# Altium PCB PCB2.PcbDoc (part 3 of 3)
Units mil, origin at the board's own origin, x right, y up, seen from the top; angles counter-clockwise.
Board outline 3877.63 x 3875.01 mil, 2 copper layers (Top Layer, Bottom Layer); 98 components, 72 nets, 361 pads, 109 vias.
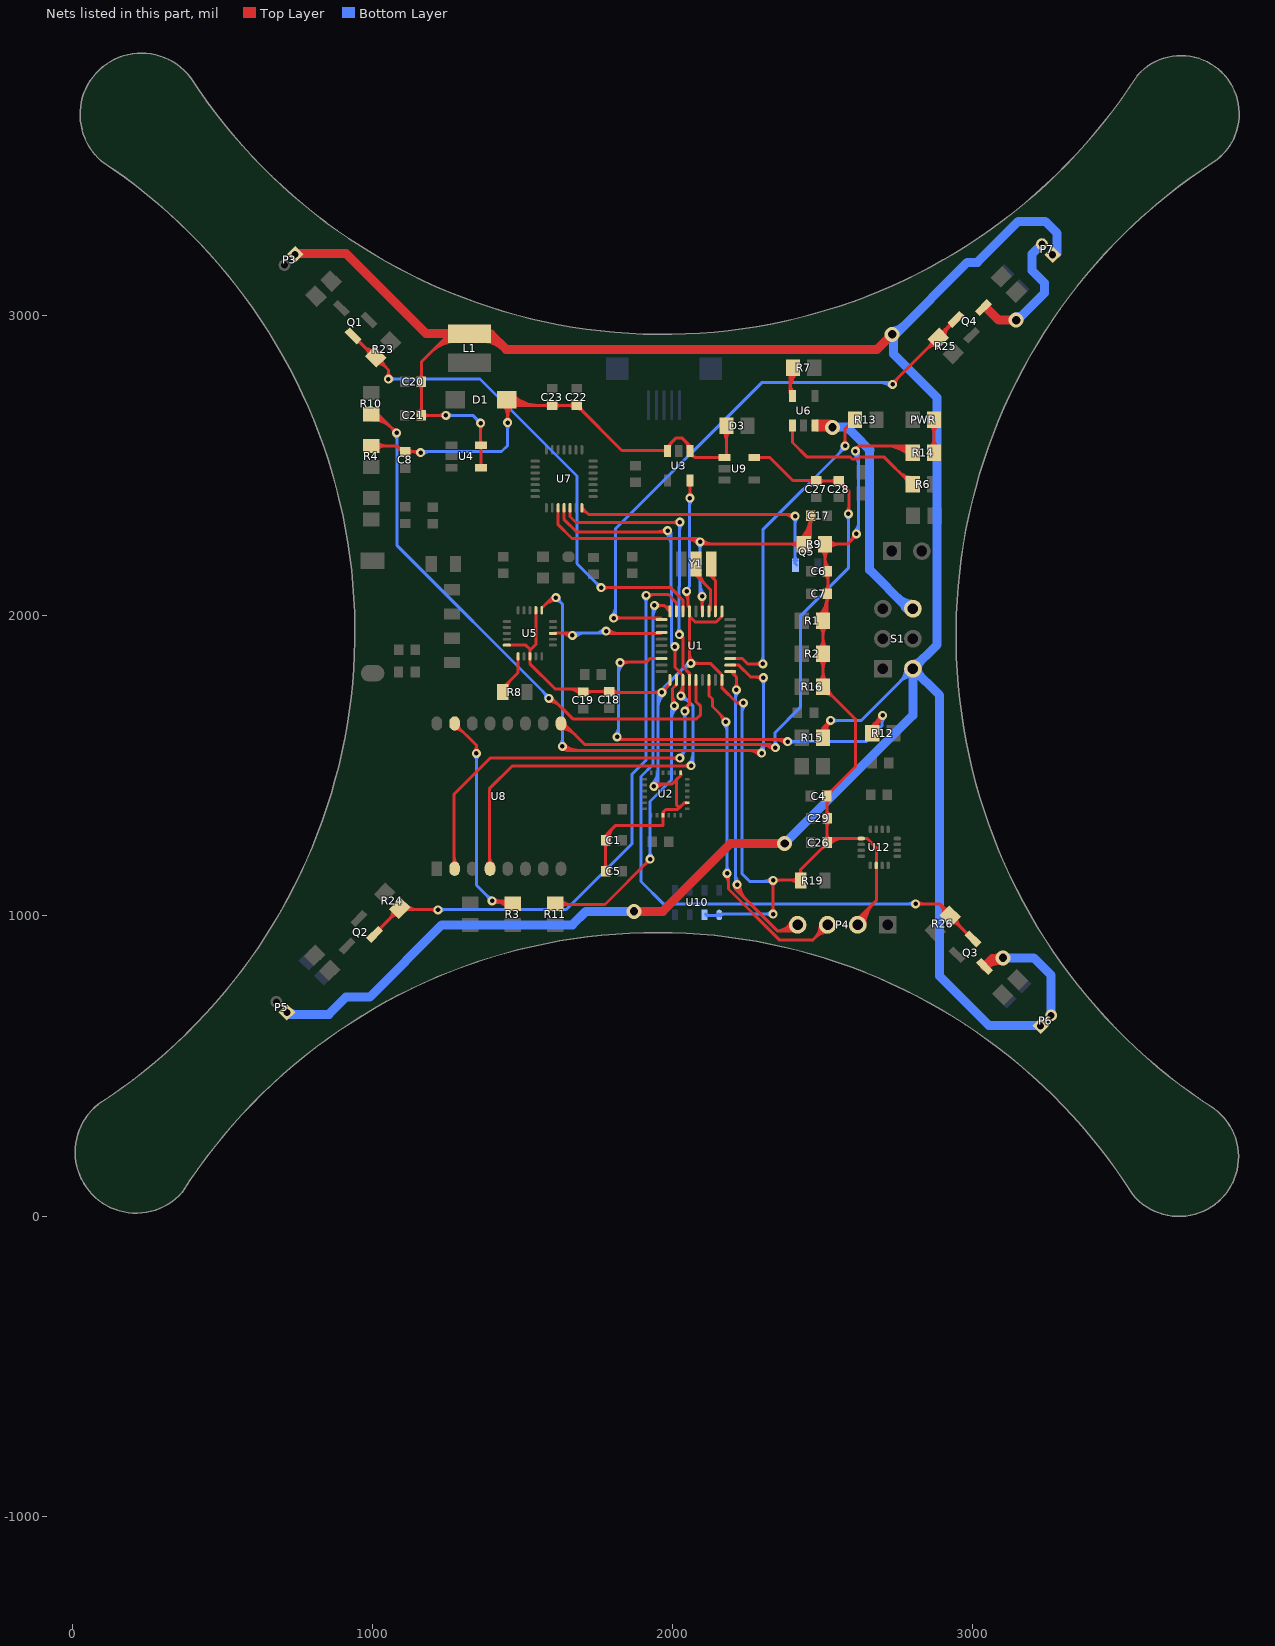
[diagram p3: the nets of this part, all layers, seen from the top]

## Via types
v1: diameter 30, hole 15, Top Layer to Bottom Layer, 92 vias
v2: diameter 50, hole 28, Top Layer to Bottom Layer, 9 vias
v3: diameter 275.59, hole 275.59, Top Layer to Bottom Layer, 4 vias
v4: diameter 90.55, hole 90.55, Top Layer to Bottom Layer, 4 vias

## Nets (pads, with @x,y where several pads share a name; then routed paths per layer and width w, separated by ;. In a path a pad name is that pad's centre, name@x,y a point inside that pad or via, vN(x,y) a via of type N, cw(c..) or ccw(c..) an arc to the next point about the centre after c; other vN are vias at no path point) (continued)
NetP6_2: P6.2 Q3.1 | length 486.8
  Top Layer w10: v2@3101,859 v2(3100,860) v2@3102,858
  Top Layer w30: 3068.62,857 ccw(c3068.62,891.38) v2@3092.93,867.07 ; v2@3098.29,850.15 ccw(c3086.66,783.34) Q3.1@3038.71,831.29 3064.42,857 3099,857 3101,859 v2@3103,861
  Bottom Layer w30: v2(3100,860) 3202,860 3260,802 P6.2@3260,672
NetP7_2: P7.2 Q4.1 | length 463.7
  Top Layer w30: Q4.1@3043,3027 3086,2984 v2(3144,2984)
  Bottom Layer w30: v2@3144,2994 ccw(c3144,3027.8) 3167.9,3003.9 ; v2@3150,2986 3238,3074 3238,3108 3197,3149 3197,3204.71 P7.2@3229.64,3237.36
NetPWR_1: PWR.1 R14.2 | length 240.7
  Top Layer w10: R14.2@2857.26,2560.1 ccw(c2825.47,2591.89) 2870.43,2591.89 ccw(c2915.39,2591.89) R14.2@2883.6,2560.1 ; PWR.1@2857.26,2635.9 cw(c2825.47,2604.11) 2870.43,2604.11 cw(c2915.39,2604.11) PWR.1@2883.6,2635.9 ; R14.2@2870.43,2553.57 PWR.1@2870.43,2653
NetQ5_2: Q5.2 U7.28 | length 1032.3
  Top Layer w10: U7.28@1697.06,2348.49 cw(c1697.06,2322.54) 1715.4,2340.89 ; U7.28@1697.06,2358.49 cw(c1697.06,2356.68) U7.28@1698.33,2357.96 ; U7.28@1697.06,2359.24 1719.29,2337 2401,2337 v1@2413,2325 ; 2369.37,2337 cw(c2369.37,2292.37) v1@2400.93,2323.93 ; 2393.51,2337 cw(c2393.51,2316.51) v1(2408,2331)
  Bottom Layer w10: v1@2400.93,2323.93 cw(c2383.86,2306.86) 2408,2306.86 cw(c2432.14,2306.86) v1@2415.07,2323.93 ; Q5.2@2403.78,2183.35 ccw(c2393.6,2193.53) 2408,2193.53 ; 2408,2196.42 ccw(c2426.48,2196.42) Q5.2@2413.41,2183.35 ; v1(2408,2331) 2408,2174 Q5.2@2414,2168
NetR3_1: R3.1 U8.15 | length 1061.9
  Top Layer w10: U8.15@1273.31,1622.33 cw(c1273.31,1577.37) 1305.1,1609.16 ; U8.15@1273.31,1640.95 1346,1568.26 v1(1346,1541) ; U8.15@1286.02,1635.05 ccw(c1302.47,1635.05) 1290.84,1623.42 ; v1@1338.93,1548.07 ccw(c1321.86,1565.14) 1346,1565.14 ccw(c1370.14,1565.14) v1@1353.07,1548.07 ; v1@1403,1041.34 cw(c1415.07,1020.43) 1421.32,1043.75 cw(c1427.57,1067.07) v1@1406.66,1055 ; v1@1405.07,1042.93 cw(c1422.14,1025.86) 1422.14,1050 cw(c1422.14,1074.14) v1@1405.07,1057.07 ; 1421.09,1050 cw(c1421.09,1001.08) R3.1@1456.77,1034.54 ; R3.1@1441.2,1050 ccw(c1441.2,1062.3) R3.1@1449.9,1053.6 ; R3.1@1449.48,1027.7 ccw(c1398,979.44) v1(1398,1050) 1461,1050 R3.1@1462,1051 ; R3.1@1472,1044 R3.1@1476,1048
  Bottom Layer w10: v1@1338.93,1533.93 cw(c1321.86,1516.86) 1346,1516.86 cw(c1370.14,1516.86) v1@1353.07,1533.93 ; v1(1346,1541) 1346,1102 v1(1398,1050) v1@1402,1050 ; v1@1388,1050 ccw(c1363.86,1050) 1380.93,1067.07 ccw(c1398,1084.14) v1@1398,1060
NetR6_2: R6.2 U6.1 | length 633
  Top Layer w10: U6.1@2393.78,2620.1 cw(c2382.15,2608.47) 2398.6,2608.47 cw(c2415.04,2608.47) U6.1@2403.41,2620.1 ; U6.1@2398.6,2632.79 2398.6,2576.4 2446,2529 2590.23,2529 2597.23,2522 2618.77,2522 2625.77,2529 2703,2529 R6.2@2785,2447 ; 2751.56,2480.44 ccw(c2799.56,2528.45) R6.2@2799.56,2460.56 ; 2768.63,2463.37 ccw(c2799.56,2494.31) R6.2@2799.56,2450.56 ; 2774.49,2457.51 cw(c2758.92,2441.94) R6.2@2780.94,2441.94
NetR7_2: R7.2 U6.5 | length 246.1
  Top Layer w10: U6.5@2390.72,2750.4 ccw(c2409.91,2750.4) U6.5@2396.34,2736.83 ; 2390.72,2752.34 cw(c2469.28,2752.34) R7.2@2413.73,2807.9 ; 2390.72,2774.54 ccw(c2434.05,2774.54) U6.5@2403.41,2743.9 ; 2390.72,2776.49 cw(c2445.14,2776.49) R7.2@2406.66,2814.97 ; R7.2@2390.72,2826 2390.72,2742.28 U6.5@2397,2736
NetR8_1: R8.1 U5.16 | length 193.7
  Top Layer w10: R8.1@1433,1758 1484.83,1809.83 U5.16@1484.83,1860.29 ; R8.1@1433.65,1766.57 ccw(c1433.65,1785.72) 1447.18,1772.18 ; R8.1@1437.35,1752.87 cw(c1460.22,1752.87) R8.1@1444.05,1769.05 ; R8.1@1447.35,1752.87 cw(c1494.36,1752.87) 1461.12,1786.12
NetS1_3: S1.6 U6.3 | length 886.6
  Top Layer w40: U6.3@2482,2633 v2@2523,2633 ; 2505.44,2633 cw(c2505.44,2600.44) v2@2528.46,2623.46
  Bottom Layer w30: v2@2530,2628 2580.02,2628 2605.51,2602.51 2657,2551.02 ; v2@2539.07,2619.93 cw(c2558.56,2600.44) 2558.56,2628 ; 2656,2544.02 2656,2152 S1.6@2778,2030 ; 2749.59,2058.41 ccw(c2800,2108.81) S1.6@2800,2037.53
  Bottom Layer w40: S1.6@2778,2030 S1.6@2797,2030
  other v2: 2532,2627
NetU1_2: U1.2 Y1.1 | length 195.6
  Top Layer w10: Y1.1@2127,2154 2127,2132 2141.96,2117.04 ; Y1.1@2130.88,2146.91 ccw(c2145.13,2137.8) 2133.17,2125.83 ; Y1.1@2139.3,2141.52 ccw(c2155.85,2130.93) 2141.96,2117.04 ; U1.2@2141.96,2014.17 2141.96,2117.04
NetU1_3: U1.3 Y1.2 | length 244.2
  Top Layer w10: Y1.2@2078,2143 2078,2134 2125,2087 2125,2018.87 U1.3@2120.31,2014.17 ; Y1.2@2080.13,2148.38 ccw(c2119.97,2148.38) 2091.8,2120.2 ; Y1.2@2090.13,2148.38 ccw(c2154.11,2148.38) 2108.87,2103.13 ; U1.3@2120.36,2028.88 ccw(c2109.17,2040.08) 2125,2040.08
NRF_IRQ: U1.29 U5.6 | length 2072
  Top Layer w10: U5.6@1566,2028 1598,2060 v1(1611,2060) ccw(c1611,2028.62) 1588.81,2050.81 ; 1571.74,2033.74 cw(c1611,1994.47) v1@1611,2050 ; v1@1634.09,1554.22 cw(c1636.59,1542.59) 1645,1551 ; v1@1639.07,1571.07 ccw(c1687.53,1619.53) 1687.53,1551 ; v1@1641.78,1561.91 ccw(c1653.41,1559.41) 1645,1551 ; 1663.38,1551 cw(c1663.38,1595.38) v1(1632,1564) 1645,1551 ; U1.29@2191.17,1835.04 2219.96,1835.04 2259,1796 2299,1796 v1(2302,1793) v1@2302,1787 ; 2250.13,1551 cw(c2250.13,1496.13) v1@2288.93,1534.93 ; 2270.62,1796 cw(c2270.62,1761.62) v1@2294.93,1785.93 ; 2274.27,1551 cw(c2274.27,1520.27) v1(2296,1542) 2287,1551 1645,1551 ; 2285.1,1796 ccw(c2285.1,1809.9) v1@2294.93,1800.07
  Bottom Layer w10: v1@1611,2050 cw(c1611,2025.86) 1628.07,2042.93 cw(c1645.14,2060) v1@1621,2060 ; v1(1611,2060) 1632,2039 v1(1632,1564) ; v1@1624.93,1571.07 ccw(c1607.86,1588.14) 1632,1588.14 ccw(c1656.14,1588.14) v1@1639.07,1571.07 ; v1@2288.93,1549.07 ccw(c2257.37,1580.63) 2302,1580.63 ; v1@2294.93,1785.93 cw(c2277.86,1768.86) 2302,1768.86 cw(c2326.14,1768.86) v1@2309.07,1785.93 ; v1(2296,1542) ccw(c2281.51,1556.49) 2302,1556.49 ; v1@2302,1542 v1(2302,1793)
PA8: R11.2 U1.20 | length 1301.7
  Top Layer w10: R11.2@1615,1038 1774,1038 v1(1925,1189) ; R11.2@1617,1040 R11.2@1618,1039 ; R11.2@1618.03,1046.53 ccw(c1638.63,1067.13) 1638.63,1038 ; R11.2@1619,1045 R11.2@1620,1044 ; R11.2@1625.1,1027.27 cw(c1651.01,1001.36) 1651.01,1038 ; R11.2@1625.1,1053.6 ccw(c1662.78,1091.27) 1662.78,1038 ; v1@1915,1189 cw(c1890.86,1189) 1907.93,1171.93 cw(c1925,1154.86) v1@1925,1179 ; 1999,1713.49 ccw(c2019.49,1713.49) v1(2005,1699) v1@2009,1699 ; 1999,1737.63 ccw(c2043.63,1737.63) v1@2012.07,1706.07 ; v1@2011,1697 1999,1709 1999,1757.16 U1.20@2011.92,1770.08
  Bottom Layer w10: v1@1917.93,1196.07 ccw(c1903.27,1210.73) 1924,1210.73 ; v1@1924,1187 1924,1381 1996,1453 1996,1686 2009,1699 v1(2005,1699) ccw(c2026.73,1677.27) 1996,1677.27 ; 1924,1215.56 ccw(c1951.56,1215.56) v1@1932.07,1196.07 ; 1996,1653.13 cw(c2050.87,1653.13) v1@2012.07,1691.93
PA11: R10.2 U1.23 | length 2204.3
  Top Layer w10: R10.2@999,2676 1013,2676 v1(1080,2609) ; R10.2@999.94,2651.94 cw(c999.94,2562.33) 1063.3,2625.7 ; R10.2@999.94,2661.94 cw(c999.94,2596.47) 1046.23,2642.77 ; R10.2@999.94,2671.94 cw(c999.94,2630.62) 1029.16,2659.84 ; v1@1070,2609 ccw(c1045.86,2609) 1062.93,2626.07 ccw(c1080,2643.14) v1@1080,2619 ; v1@1587,1714 cw(c1587,1660.89) 1624.56,1698.44 ; 1607.49,1715.51 ccw(c1587,1695.03) v1(1587,1724) 1599,1724 1667,1656 2079,1656 2093,1670 2093,1698 2077,1714 U1.23@2077,1785.83
  Bottom Layer w10: v1@1072.93,2601.93 cw(c1051.03,2580.03) 1082,2580.03 ; v1(1080,2609) 1082,2607 1082,2233 1591,1724 v1(1587,1724) ; 1082,2589.69 cw(c1099.31,2589.69) v1@1087.07,2601.93 ; 1567.1,1747.9 cw(c1543.2,1724) v1@1577,1724 ; 1576.76,1738.24 ccw(c1587,1748.49) v1@1587,1734
PB1: R12.1 U1.16 | length 1919.3
  Top Layer w10: v1@1815,1595 v1(1815,1596) ; v1@1820,1846 1821,1845 1911.77,1845 1923.46,1856.69 U1.16@1962.83,1856.69 ; v1@1823,1587 v1@2380,1587 ; v1@1832.07,1835.93 cw(c1853.97,1814.03) 1853.97,1845 ; v1@1832.07,1850.07 ccw(c1844.31,1862.31) 1844.31,1845 ; 2341.96,1587 cw(c2341.96,1538.96) v1@2375.93,1572.93 ; 2366.1,1587 cw(c2366.1,1563.1) v1(2383,1580) ; R12.1@2660,1616 2660,1629 v1(2699,1668) ccw(c2740.5,1626.49) R12.1@2682.86,1615.44 ; R12.1@2663.21,1611.68 cw(c2695.73,1617.91) 2672.32,1641.32 ; R12.1@2673.04,1613.56 cw(c2718.11,1622.2) 2685.66,1654.66 ; 2676.81,1639.32 cw(c2712.15,1618.92) 2701.59,1658.34 ccw(c2707.84,1635.02) 2686.93,1647.09 ccw(c2666.02,1659.16) v1@2689.34,1665.41 ; 2684.25,1652.22 cw(c2694.92,1646.06) v1@2697.17,1658.17 ; v1@2689,1668 cw(c2664.86,1668) 2681.93,1650.93 cw(c2699,1633.86) v1@2699,1658
  Bottom Layer w10: v1@1807.93,1603.07 ccw(c1781.2,1629.8) 1819,1629.8 ; v1@1819,1596 1819,1846 v1@1820,1846 ; 1819,1610.49 ccw(c1829.49,1610.49) v1@1822.07,1603.07 ; 1819,1804.37 cw(c1863.63,1804.37) v1@1832.07,1835.93 ; 1819,1828.51 cw(c1839.49,1828.51) v1(1825,1843) ; v1@2377,1574 v1(2383,1580) 2644,1580 2697,1633 v1@2697,1666 ; v1@2390.07,1572.93 cw(c2407.14,1555.86) 2407.14,1580 cw(c2407.14,1604.14) v1@2390.07,1587.07 ; v1@2691.93,1660.93 cw(c2679.69,1648.69) 2697,1648.69 ; 2697,1639.03 cw(c2727.97,1639.03) v1@2706.07,1660.93
PB3: R13.1 U1.30 | length 1272.8
  Top Layer w10: U1.30@2191.17,1856.69 2232.31,1856.69 2250,1839 v1(2300,1839) ; v1@2292.93,1831.93 ccw(c2275.86,1814.86) 2275.86,1839 ccw(c2275.86,1863.14) v1@2292.93,1846.07 ; v1@2566.93,2572.07 ccw(c2549.86,2589.14) 2574,2589.14 ccw(c2598.14,2589.14) v1@2581.07,2572.07 ; v1(2574,2565) 2574,2623 ; 2581.79,2630.79 ccw(c2564.52,2648.06) R13.1@2588.95,2648.06 ; R13.1@2585.9,2634.9 cw(c2599.63,2621.17) R13.1@2605.13,2639.79 ; R13.1@2600,2649 2574,2623 ; R13.1@2602.3,2630.2 ccw(c2594.21,2602.79) 2574,2623
  Bottom Layer w10: v1@2292.93,1846.07 ccw(c2275.86,1863.14) 2300,1863.14 ccw(c2324.14,1863.14) v1@2307.07,1846.07 ; v1(2300,1839) 2300,2286 2574,2560 v1(2574,2565) ; 2553.39,2539.39 ccw(c2527.79,2565) v1@2564,2565 ; 2565.46,2551.46 cw(c2574,2542.93) v1@2574,2555
PWMA: Q1.3 R23.1 U1.7 | length 2029.9
  Top Layer w10: Q1.3@935.26,2931.84 1009.11,2858 R23.1@1012,2858 ; Q1.3@947.1,2913.2 cw(c947.1,2896.76) 958.72,2908.38 cw(c970.35,2920.01) Q1.3@953.91,2920.01 ; 967.2,2899.9 ccw(c1007.16,2939.86) R23.1@1007.16,2883.35 ; 978.76,2888.35 cw(c955.14,2864.73) R23.1@988.54,2864.73 ; 984.27,2882.83 ccw(c1007.16,2905.72) R23.1@1007.16,2873.35 ; R23.1@1012.73,2840.54 cw(c1012.73,2797.74) 1043,2828 ; R23.1@1015,2856 1053,2818 v1(1053,2788) ; R23.1@1031.35,2859.16 ccw(c1078.46,2859.16) 1045.15,2825.85 ; v1@1045.93,2795.07 ccw(c1028.86,2812.14) 1053,2812.14 ccw(c1077.14,2812.14) v1@1060.07,2795.07 ; v1(1761,2093) 1993,2093 2033.69,2052.31 U1.7@2033.69,2014.17 ; v1@1768.07,2085.93 cw(c1785.14,2068.86) 1785.14,2093 cw(c1785.14,2117.14) v1@1768.07,2100.07
  Bottom Layer w10: v1(1053,2788) 1358,2788 1681,2465 1681,2173 v1(1761,2093) ; v1@1060.07,2780.93 cw(c1077.14,2763.86) 1077.14,2788 cw(c1077.14,2812.14) v1@1060.07,2795.07 ; v1@1751,2093 ccw(c1726.86,2093) 1743.93,2110.07 ccw(c1761,2127.14) v1@1761,2103
PWMB: Q2.3 R24.1 U1.8 | length 2360.1
  Top Layer w10: Q2.3@1007.16,938.26 1007.16,940.16 R24.1@1094,1027 ; Q2.3@1018.99,956.91 ccw(c1018.99,968.78) 1027.38,960.38 ; Q2.3@1025.8,950.1 cw(c1046.82,950.1) 1031.96,964.96 ; 1054.14,987.14 ccw(c1019.12,1022.16) R24.1@1068.65,1022.16 ; 1058.71,991.71 cw(c1087.27,963.15) R24.1@1087.27,1003.54 ; 1071.21,1004.21 ccw(c1053.27,1022.16) R24.1@1078.65,1022.16 ; R24.1@1090.05,1024.95 1103,1025 1107,1021 v1@1222,1021 ; R24.1@1098.93,1033.83 ccw(c1129.9,1064.79) 1129.9,1021 ; R24.1@1106.01,1014.56 cw(c1121.55,999.02) 1121.55,1021 ; R24.1@1106.01,1040.9 ccw(c1154.04,1088.93) 1154.04,1021 ; 1191.44,1021 cw(c1191.44,993.44) v1@1210.93,1012.93 ; 1196.27,1021 ccw(c1196.27,1041.73) v1@1210.93,1027.07 ; v1@1907,2071 v1(1911,2067) 1914,2070 1986,2070 2012.04,2043.96 U1.8@2012.04,2014.17 ; v1@1918.07,2059.93 cw(c1942.38,2035.62) 1942.38,2070 ; v1@1918.07,2074.07 ccw(c1927.9,2083.9) 1927.9,2070
  Bottom Layer w10: v1@1221,1021 1645,1021 1865,1241 1865,1472 1911,1518 v1(1911,2067) ; v1@1225.07,1012.93 cw(c1244.56,993.44) 1244.56,1021 ; v1@1225.07,1027.07 ccw(c1239.73,1041.73) 1239.73,1021 ; v1@1903.93,2059.93 cw(c1886.86,2042.86) 1911,2042.86 cw(c1935.14,2042.86) v1@1918.07,2059.93
  other v1: 1218,1020
PWMC: Q3.3 R26.1 U1.9 | length 2558.8
  Top Layer w10: v1(1939,2034) 1970.56,2034 ; v1@1946.07,2026.93 cw(c1963.14,2009.86) 1963.14,2034 cw(c1963.14,2058.14) v1@1946.07,2041.07 ; 1982.57,2021.99 ccw(c1990.19,2029.61) U1.9@1993.16,2019.25 ; U1.9@1990.39,2014.17 1970.56,2034 ; U1.9@1990.41,2028.86 cw(c1984.85,2048.29) 1970.56,2034 ; v1(2809,1040) 2889,1040 ; v1@2816.07,1032.93 cw(c2833.14,1015.86) 2833.14,1040 cw(c2833.14,1064.14) v1@2816.07,1047.07 ; 2899.54,1029.46 ccw(c2921.27,1051.2) R26.1@2921.27,1020.46 ; R26.1@2902.7,1003.19 ccw(c2855.63,1006.63) 2889,1040 ; 2904.46,1024.54 cw(c2884.44,1004.53) R26.1@2912.67,1002.47 ; R26.1@2916,1013 2889,1040 ; R26.1@2924,997 2997.84,923.16 Q3.3@2999.74,923.16 ; R26.1@2926.84,977.65 cw(c2926.84,937.78) 2955.03,965.97 ; R26.1@2935.46,996.27 ccw(c2961.37,996.27) 2943.05,977.95 ; R26.1@2945.46,996.27 ccw(c2995.51,996.27) 2960.12,960.88 ; 2973.04,947.96 ccw(c2987.9,962.82) Q3.3@2987.9,941.8 ; 2977.62,943.38 cw(c2969.22,934.99) Q3.3@2981.09,934.99
  Bottom Layer w10: v1@1931.93,2026.93 cw(c1924.51,2019.51) 1935,2019.51 ; 1935,2000.2 cw(c1972.8,2000.2) v1@1946.07,2026.93 ; v1(1939,2034) 1935,2030 1935,1505 1894,1464 1894,1114 1968,1040 v1(2809,1040) ; v1@2801.93,1032.93 ccw(c2784.86,1015.86) 2784.86,1040 ccw(c2784.86,1064.14) v1@2801.93,1047.07
PWMD: Q4.3 R25.1 U1.10 | length 2332.9
  Top Layer w10: v1(1803,1992) 1957.44,1992 ; v1@1810.07,1984.93 cw(c1827.14,1967.86) 1827.14,1992 cw(c1827.14,2016.14) v1@1810.07,1999.07 ; 1935.25,1992 cw(c1935.25,1973.8) U1.10@1948.12,1986.67 ; U1.10@1962.83,1986.61 1957.44,1992 ; U1.10@1962.9,1986.62 ccw(c1957.44,1986.53) 1957.44,1992 ; v1(2732,2770) 2732,2774 2865,2907 R25.1@2883,2907 ; v1@2732,2780 ccw(c2732,2794.49) 2742.24,2784.24 ; v1@2742,2770 cw(c2775.8,2770) 2751.9,2793.9 ; 2843.73,2885.73 cw(c2882.16,2847.3) R25.1@2882.16,2901.65 ; 2853.12,2895.12 ccw(c2827.97,2920.27) R25.1@2863.54,2920.27 ; 2860.8,2902.8 cw(c2882.16,2881.44) R25.1@2882.16,2911.65 ; R25.1@2884.95,2923.06 2884.95,2930.95 Q4.3@2942,2988 ; R25.1@2887.73,2944.46 ccw(c2887.73,2970.37) 2906.05,2952.05 ; R25.1@2896.35,2925.84 cw(c2936.22,2925.84) 2908.03,2954.03 ; R25.1@2906.35,2925.84 cw(c2970.36,2925.84) Q4.3@2925.1,2971.1 ; 2915.79,2961.79 cw(c2931.01,2946.57) Q4.3@2931.01,2968.09 ; 2916.12,2955.55 cw(c2939.87,2941.83) Q4.3@2932.77,2968.33 ; 2920.87,2966.87 ccw(c2912.84,2974.9) Q4.3@2924.2,2974.9
  Bottom Layer w10: v1@1795.93,1999.07 ccw(c1761.96,2033.04) 1810,2033.04 ; 1810,2008.9 cw(c1786.1,2008.9) v1(1803,1992) 1810,1999 1810,2290 2296,2776 v1@2730,2776 ; 2693.37,2776 cw(c2693.37,2731.37) v1@2724.93,2762.93 ; 2717.51,2776 cw(c2717.51,2755.51) v1(2732,2770)
RESET: C17.2 R9.1 U1.4 U7.24 | length 1881.3
  Top Layer w10: U7.24@1617,2353 1617,2304 1664,2257 2080,2257 ; 2040.3,2257 cw(c2040.3,2195.3) v1@2083.93,2238.93 ; 2064.44,2257 cw(c2064.44,2219.44) v1(2091,2246) ; v1@2081.63,2249.5 ccw(c2074.98,2251.98) 2080,2257 ; v1@2087.5,2255.37 cw(c2085.02,2262.02) 2080,2257 ; v1@2090.93,2056.93 cw(c2073.86,2039.86) 2098,2039.86 cw(c2122.14,2039.86) v1@2105.07,2056.93 ; v1(2098,2064) 2098,2019 U1.4@2100,2017 ; v1@2098.07,2253.07 ccw(c2134.46,2289.46) 2134.46,2238 ; 2110.31,2238 cw(c2110.31,2265.31) v1(2091,2246) ; R9.1@2423.4,2224.83 ccw(c2391.61,2193.04) 2391.61,2238 ccw(c2391.61,2282.96) R9.1@2423.4,2251.17 ; R9.1@2424.35,2255.99 ccw(c2357.4,2333) C17.2@2459.44,2333 2459.44,2264.44 R9.1@2438,2243 ; R9.1@2430.91,2248.44 ccw(c2376.48,2311.05) 2459.44,2311.05 ; R9.1@2436.57,2238 2099,2238 v1(2091,2246) ; R9.1@2437.47,2240.9 ccw(c2395.56,2289.11) 2459.44,2289.11 ; R9.1@2444.03,2233.35 ccw(c2414.64,2267.16) 2459.44,2267.16 ; C17.2@2451.84,2323.43 cw(c2433.49,2305.08) 2459.44,2305.08 cw(c2485.39,2305.08) C17.2@2467.04,2323.43 ; 2080,2257 v1(2091,2246)
  Bottom Layer w10: v1@2083.93,2238.93 cw(c2066.86,2221.86) 2091,2221.86 cw(c2115.14,2221.86) v1@2098.07,2238.93 ; 2091,2080.9 ccw(c2114.9,2080.9) v1(2098,2064) ; 2091,2105.04 ccw(c2139.04,2105.04) v1@2105.07,2071.07 ; v1(2091,2246) 2091,2071 v1(2098,2064) ; v1@2096,2062 v1(2098,2064)
SCK: U1.12 U5.3 | length 624.1
  Top Layer w10: U5.3@1604,1942 1658,1942 v1(1666,1934) ccw(c1646.69,1914.69) 1646.69,1942 ; 1622.54,1942 cw(c1622.54,1890.54) v1@1658.93,1926.93 ; v1@1778,1942 v1(1778,1948) ; v1@1785.07,1955.07 ccw(c1821.46,1991.46) 1821.46,1940 ; 1797.31,1940 cw(c1797.31,1967.31) v1(1778,1948) ; 1940.27,1940 ccw(c1940.27,1951.1) U1.12@1948.12,1943.25 ; U1.12@1962.83,1943.31 1959.52,1940 1786,1940 v1(1778,1948)
  Bottom Layer w10: v1@1673.07,1926.93 cw(c1709.46,1890.54) 1709.46,1942 ; 1685.31,1942 ccw(c1685.31,1914.69) v1(1666,1934) 1674,1942 1772,1942 v1(1778,1948) cw(c1763.51,1962.49) 1763.51,1942 ; 1739.37,1942 ccw(c1739.37,1986.63) v1@1770.93,1955.07
SWCLK: P4.4 U1.28 | length 1449
  Top Layer w10: U1.28@2193,1814 2212,1795 ; U1.28@2195.96,1814.8 ccw(c2202.56,1813.87) U1.28@2197.84,1809.16 ; v1@2204,1104 ccw(c2228.14,1104) 2211.07,1086.93 ; v1@2204.93,1760.07 ccw(c2187.86,1777.14) 2212,1777.14 ccw(c2236.14,1777.14) v1@2219.07,1760.07 ; U1.28@2205.86,1813.4 ccw(c2227.34,1810.34) 2212,1795 ; v1@2207.66,1096.27 cw(c2198.39,1084.97) 2213,1084.97 cw(c2224.95,1084.97) v1@2218.99,1095.33 ; v1(2212,1753) 2212,1795 ; v1@2213,1101 2213,1085 2348,950 ; v1(2214,1104) ccw(c2262.28,1104) 2228.14,1069.86 ; v1@2224,1104 ccw(c2296.43,1104) 2245.21,1052.79 ; 2363.27,950 ccw(c2363.27,993) P4.4@2402.68,975.81 ; 2378.54,950 ccw(c2378.54,986.34) P4.4@2411.85,971.81 ; P4.4@2393.52,979.81 cw(c2348,999.66) 2348,950 ; 2393.82,950 ccw(c2393.82,979.68) P4.4@2421.02,967.81 ; P4.4@2414,950 2348,950
  Bottom Layer w10: v1@2204.93,1745.93 cw(c2195.1,1736.1) 2209,1736.1 ; 2209,1140.21 ccw(c2250.21,1140.21) v1@2221.07,1111.07 ; 2209,1721.62 cw(c2243.38,1721.62) v1@2219.07,1745.93 ; v1@2209,1747 2209,1106 v1@2215,1100
SWDIO: P4.3 U1.25 | length 1399.1
  Top Layer w10: U1.25@2120.31,1785.83 2120.31,1733.69 2132,1722 2132,1697 v1@2179,1650 ; 2155.69,1673.31 cw(c2128.37,1646) v1@2167,1646 ; v1@2173.93,1133.93 cw(c2144.79,1104.79) 2186,1104.79 ; v1@2186,1136 2186,1089 2356,919 2464,919 2465,918 P4.3@2500,953 ; 2473.42,926.42 ccw(c2429.84,970) P4.3@2491.47,970 ; 2475.84,928.84 cw(c2516,888.67) P4.3@2516,945.47 ; 2490.49,943.49 ccw(c2463.99,970) P4.3@2501.47,970 ; 2492.91,945.91 cw(c2516,922.81) P4.3@2516,955.47
  Bottom Layer w10: v1@2169.93,1638.93 cw(c2143.2,1612.2) 2181,1612.2 ; v1@2173.93,1148.07 ccw(c2156.86,1165.14) 2181,1165.14 ccw(c2205.14,1165.14) v1@2188.07,1148.07 ; v1(2181,1141) v1@2181,1647 ; 2181,1631.51 cw(c2191.49,1631.51) v1@2184.07,1638.93
  other v1: 2177,1646
USART1_RX: U1.22 U7.26 U8.2 | length 2625.3
  Top Layer w10: U8.2@1264.32,1171.6 ccw(c1245.77,1190.15) 1272,1190.15 ; U8.2@1272,1170 1272,1406 1391,1525 v1(2024,1525) ; 1272,1196.46 ccw(c1307.17,1196.46) U8.2@1282.3,1171.6 ; U8.2@1274,1164 U8.2@1277,1167 ; 1657,2343 1657.69,2342.31 ; U7.26@1657.69,2359.24 1657.69,2342.31 ; 1997.44,2310 ccw(c1997.44,2337.56) v1@2016.93,2318.07 ; 2002.27,2310 cw(c2002.27,2289.27) v1@2016.93,2303.93 ; v1@2016.93,1517.93 ccw(c1999.86,1500.86) 1999.86,1525 ccw(c1999.86,1549.14) v1@2016.93,1532.07 ; v1@2022,1935 v1(2022,1937) ; v1(2024,2311) 2021,2314 2016,2314 2012,2310 1678,2310 1657.69,2330.31 1657.69,2342.31 ; v1@2026,1935 2034,1927 ; v1@2026.62,1928.13 cw(c2029.54,1922.54) 2034,1927 ; v1@2031.75,1934.79 ccw(c2039.93,1932.93) 2034,1927 ; v1@2034,1683 2055.35,1704.35 ; v1(2040,1682) v1@2050,1682 ; v1@2049.72,1684.35 cw(c2070.36,1689.33) 2055.35,1704.35 ; 2050.49,1812.51 cw(c2038.56,1800.59) U1.22@2055.42,1800.59 ; U1.22@2055.35,1785.83 2055.35,1704.35 ; U1.22@2055.35,1786.83 2055.35,1807.65 ; U1.22@2055.4,1800.53 ccw(c2051.76,1804.07) 2055.35,1807.65 ; 2034,1927 2034,1829 2055.35,1807.65
  Bottom Layer w10: v1@2014.93,1944.07 ccw(c2002.69,1956.31) 2020,1956.31 ; v1@2016.93,2303.93 cw(c2002.27,2289.27) 2023,2289.27 ; 2020,1965.97 ccw(c2050.97,1965.97) v1@2029.07,1944.07 ; v1(2022,1937) 2022,1935 2020,1937 2020,2094.77 2023,2097.77 2023,2323 2024,2322 v1(2024,2311) ; v1@2023,1532 2040,1549 ; 2023,2284.44 cw(c2050.56,2284.44) v1@2031.07,2303.93 ; v1@2032.93,1674.93 cw(c2015.86,1657.86) 2040,1657.86 cw(c2064.14,1657.86) v1@2047.07,1674.93 ; v1@2033.75,1527.24 cw(c2056.53,1532.47) 2040,1549 ; v1@2050,1682 v1(2040,1682) 2040,1549
USART1_TX: U1.21 U7.25 U8.4 | length 2575.9
  Top Layer w10: U8.4@1382.43,1171.6 ccw(c1366.56,1187.47) 1389,1187.47 ; U8.4@1389,1171 1389,1423 1465,1499 2060,1499 v1(2061,1500) ; 1389,1199.14 ccw(c1427.96,1199.14) U8.4@1400.41,1171.6 ; U8.4@1392,1170 U8.4@1398,1176 ; U7.25@1637,2358 1637,2321 1679,2279 v1@1980,2279 ; 1949.2,2279 ccw(c1949.2,2316.8) v1@1975.93,2290.07 ; 1968.51,2279 cw(c1968.51,2268.51) v1@1975.93,2275.93 ; v1@1999.93,1889.93 cw(c1980.44,1870.44) 2008,1870.44 ; v1(2007,1897) 2007,1893 2008,1892 2008,1827.15 U1.21@2033.07,1802.07 ; 2008,1875.27 cw(c2028.73,1875.27) v1@2014.07,1889.93 ; v1@2019.93,1740.07 ccw(c1986.7,1773.3) U1.21@2033.69,1773.3 ; 2033.69,1749.16 cw(c2010.84,1749.16) v1(2027,1733) 2033,1733 2033.69,1732.31 U1.21@2033.69,1785.83 ; 2034.44,1499 ccw(c2034.44,1526.56) v1@2053.93,1507.07 ; 2039.27,1499 cw(c2039.27,1478.27) v1@2053.93,1492.93 ; U1.21@2033.69,1785.83 2033.83,1785.83 2033.83,1795.83 2034,1796 U1.21@2033.69,1785.83
  Bottom Layer w10: v1@1975.95,2275.91 cw(c1932.25,2232) 1994.2,2232.16 ; v1(1983,2283) cw(c1956.34,2256.21) 1994.14,2256.3 ; v1@1991,2280 1994.09,2276.93 1995,1905 2007,1893 v1(2007,1897) ; v1@2027,1723 cw(c2027,1681.96) 2056.02,1710.98 ; v1(2027,1733) v1@2033,1733 ; v1@2031,1731 v1@2033,1733 ; v1@2053.93,1507.07 ccw(c2022.37,1538.63) 2067,1538.63 ; v1(2061,1500) ccw(c2046.51,1514.49) 2067,1514.49 ; v1@2067,1505 2067,1700 2034,1733 v1@2033,1733
VCC3.3: C1.1 C4.1 C5.1 C6.1 C7.1 C18.2 C19.2 C26.2 C29.2 P4.2 R1.1 R2.1 R9.2 R14.1 R16.2 R19.2 U1.1 U1.6 U1.19 U1.27 U2.3 U2.8 U2.13 U3.5 U5.7 U5.15 U5.18 U10.1 U10.2 U12.2 U12.13 | length 9546.8
  Top Layer w10: U5.15@1447.42,1901.63 1510.37,1901.63 1525,1887 ; U5.18@1524,1866 1524,1884 1543.88,1903.88 U5.7@1543.88,2017.77 ; U5.18@1524.2,1864.23 1524,1864.03 1524,1840 1608,1756 C19.2@1687,1756 ; 1648.88,1756 cw(c1648.88,1694.41) C19.2@1692.43,1737.96 ; 1673.02,1756 cw(c1673.02,1718.55) C19.2@1699.5,1745.03 ; C19.2@1687.56,1748 C18.2@1799,1748 ; C19.2@1711.57,1737.96 cw(c1735.81,1713.72) 1735.81,1748 ; C19.2@1711.57,1753.16 ccw(c1724.03,1765.62) 1724.03,1748 ; 1757.61,1748 cw(c1757.61,1717.14) C18.2@1779.43,1738.96 ; 1764.56,1748 ccw(c1764.56,1769.03) C18.2@1779.43,1754.16 ; C5.1@1768.84,1157.57 ccw(c1750.49,1175.92) 1776.44,1175.92 ccw(c1802.39,1175.92) C5.1@1784.04,1157.57 ; C1.1@1768.84,1241.93 cw(c1750.49,1223.58) 1776.44,1223.58 cw(c1802.39,1223.58) C1.1@1784.04,1241.93 ; C1.1@1774,1266 1808.37,1300.37 1967.37,1300.37 U2.3@1967.37,1335 ; C5.1@1776.44,1149.56 C1.1@1776.44,1251.5 ; C1.1@1777.19,1253.47 cw(c1815.15,1253.47) 1788.31,1280.31 ; C1.1@1778,1261 C1.1@1779,1260 ; C18.2@1787,1744.56 v1(1963.44,1744.56) ; C1.1@1787.19,1253.47 cw(c1849.29,1253.47) 1805.38,1297.38 ; C18.2@1798.57,1738.96 cw(c1812.09,1725.44) 1812.09,1744.56 ; C18.2@1798.57,1754.16 ccw(c1821.74,1777.34) 1821.74,1744.56 ; v1@1944.07,1423.93 cw(c1980.46,1387.54) 1980.46,1439 ; 1956.31,1439 ccw(c1956.31,1411.69) v1(1937,1431) 1937,1433 1943,1439 1998,1439 2026.42,1467.42 ; v1@1956.37,1737.49 ccw(c1939.3,1720.42) 1939.3,1744.56 ccw(c1939.3,1768.7) v1@1956.37,1751.63 ; v1@1963.44,1754.56 ccw(c1963.44,1778.7) 1980.51,1761.63 ccw(c1997.58,1744.56) v1@1973.44,1744.56 ; U2.3@1966.9,1338.35 cw(c1980.3,1338.35) 1970.82,1347.82 ; U2.3@1967,1342 1967,1344 1977,1354 2016,1354 2022,1360 ; v1@1971,1741 v1(1963.44,1744.56) ; U1.19@1990,1779 1990,1771.12 v1(1963.44,1744.56) ; U2.13@2026.42,1480 U2.13@2026.42,1476.73 2026.42,1467.42 ; 2027,1468 2026.42,1467.42 ; 2034.62,1372.62 cw(c2044.73,1362.52) U2.8@2044.73,1376.81 ; v1@2038.93,2073.93 cw(c2009.79,2044.79) 2051,2044.79 ; v1@2043,2086 2043,2078 2051,2070 2051,2031 U1.6@2056,2026 ; U2.8@2044.99,1376.73 ccw(c2041.95,1372.05) 2038,1376 ; U2.8@2047,1376 2038,1376 ; v1@2050.33,2398.67 ccw(c2033.26,2415.74) 2057.4,2415.74 ccw(c2081.54,2415.74) v1@2064.47,2398.67 ; 2051,2039.24 ccw(c2065.65,2039.24) U1.6@2055.29,2028.88 ; U3.5@2052.59,2437.1 cw(c2040.96,2425.47) 2057.4,2425.47 cw(c2073.85,2425.47) U3.5@2062.22,2437.1 ; v1@2055,1847 2055.35,1847.35 U1.6@2055.35,2014.17 2056,2013.52 2056,1997.89 2075.89,1978 2144,1978 U1.1@2164,1998 ; 2055.35,1876.38 ccw(c2095.38,1876.38) 2067.07,1848.07 ccw(c2084.14,1865.14) 2084.14,1841 ccw(c2084.14,1816.86) v1@2067.07,1833.93 ; v1(2057.4,2391.6) U3.5@2057.4,2449.79 ; v1(2060,1841) 2125,1841 U1.27@2165,1801 ; U1.27@2163.61,1785.83 2163.61,1759.39 2214,1709 ; v1@2227.24,1702.7 ccw(c2214,1691.95) 2214,1709 ; v1@2227.24,1715.3 cw(c2214,1726.05) 2214,1709 ; v1@2230,1709 2214,1709 ; v1@2321,1119 R19.2@2413,1119 ; v1@2326.93,1013.07 ccw(c2309.86,1030.14) 2334,1030.14 ccw(c2358.14,1030.14) v1@2341.07,1013.07 ; v1@2326.93,1110.93 cw(c2309.86,1093.86) 2334,1093.86 cw(c2358.14,1093.86) 2341.07,1110.93 cw(c2360.56,1091.44) 2360.56,1119 ; v1(2334,1118) 2334,1008 v1@2335,1007 ; v1@2341.07,1125.07 ccw(c2355.73,1139.73) 2355.73,1119 ; 2388.07,1119 cw(c2388.07,1079.09) R19.2@2416.29,1107.31 ; 2397.73,1119 ccw(c2397.73,1145.25) R19.2@2416.29,1126.69 ; R19.2@2417.25,1135.43 ccw(c2401.92,1153.97) 2425.98,1153.97 ccw(c2450.03,1153.97) R19.2@2434.7,1135.43 ; R19.2@2425.98,1117 2425.98,1153.98 2512,1240 C26.2@2514.56,1244 2511,1243 C26.2@2513.56,1245.56 ; R16.2@2487.61,1780.1 ccw(c2455.82,1811.89) 2500.78,1811.89 ccw(c2545.74,1811.89) R16.2@2513.95,1780.1 ; R2.1@2487.61,1855.9 cw(c2455.82,1824.11) 2500.78,1824.11 cw(c2545.74,1824.11) R2.1@2513.95,1855.9 ; R2.1@2487.61,1890.1 ccw(c2455.82,1921.89) 2500.78,1921.89 ccw(c2545.74,1921.89) R2.1@2513.95,1890.1 ; R1.1@2487.61,1965.9 cw(c2455.82,1934.11) 2500.78,1934.11 cw(c2545.74,1934.11) R1.1@2513.95,1965.9 ; R1.1@2487.61,2000.1 ccw(c2422.55,2065.16) C7.1@2514.56,2065.16 ; R9.2@2494.27,2220.9 cw(c2462.48,2189.11) 2507.43,2189.11 cw(c2552.39,2189.11) R9.2@2520.6,2220.9 ; R1.1@2494.68,1993.03 ccw(c2446.7,2041.02) 2514.56,2041.02 ; 2495.31,1223.31 cw(c2514.56,1204.06) C26.2@2514.56,1231.28 ; 2496.59,1224.59 ccw(c2479.14,1242.03) C26.2@2503.81,1242.03 ; R16.2@2500.78,1740.44 cw(c2500.78,1685.98) 2539.29,1724.49 ; R16.2@2500.78,1750.44 cw(c2500.78,1720.12) R16.2@2522.22,1741.56 ; R2.1@2500.78,1873 R16.2@2500.78,1763 2609,1654.78 2609,1497 C4.1@2518,1406 ; R1.1@2500.78,1983 2500.78,1875.22 R2.1@2501,1875 ; R1.1@2501.75,1985.96 ccw(c2470.84,2016.88) 2514.56,2016.88 ; C4.1@2505.96,1389.43 cw(c2487.61,1371.08) 2513.56,1371.08 cw(c2539.51,1371.08) C4.1@2521.16,1389.43 ; C26.2@2506.96,1253.57 ccw(c2491.03,1269.5) 2513.56,1269.5 ; C29.2@2506.96,1315.43 cw(c2491.03,1299.5) 2513.56,1299.5 ; C29.2@2506.96,1334.57 ccw(c2491.03,1350.5) 2513.56,1350.5 ; C7.1@2506.96,2063.43 cw(c2488.61,2045.08) 2514.56,2045.08 cw(c2540.51,2045.08) C7.1@2522.16,2063.43 ; C7.1@2506.96,2082.57 ccw(c2482.72,2106.81) 2517,2106.81 ; C6.1@2506.96,2138.43 cw(c2482.72,2114.19) 2517,2114.19 ; 2507.43,2168.98 ccw(c2533.57,2168.98) C6.1@2515.09,2150.5 ; 2507.43,2193.12 ccw(c2557.71,2193.12) C6.1@2522.16,2157.57 ; R9.2@2513,2237 R9.2@2513,2238 ; C26.2@2513.56,1241.56 C26.2@2513.56,1245.56 ; 2513.56,1274.34 ccw(c2542.93,1274.34) C26.2@2522.16,1253.57 ; 2513.56,1294.66 cw(c2542.93,1294.66) C29.2@2522.16,1315.43 ; 2513.56,1355.34 ccw(c2542.93,1355.34) C29.2@2522.16,1334.57 ; C4.1@2513.56,1399 C26.2@2513.56,1245.56 ; C4.1@2513.56,1411.72 ccw(c2513.56,1436.24) 2530.9,1418.9 ; R1.1@2514.56,1997.56 C7.1@2514.56,2073 ; C26.2@2515.09,1245.44 cw(c2544.27,1216.26) 2544.27,1257.53 ; C7.1@2517,2075 2517,2143 2507.43,2152.57 R9.2@2507.43,2238 R9.2@2513,2238 ; 2517,2095.03 ccw(c2534.62,2095.03) C7.1@2522.16,2082.57 ; 2517,2125.97 cw(c2534.62,2125.97) C6.1@2522.16,2138.43 ; R16.2@2519.4,1759.06 ccw(c2554.85,1759.06) 2529.79,1733.99 ; R9.2@2520,2249 2513,2242 R9.2@2513,2238 ; R9.2@2520.6,2224.83 cw(c2552.39,2193.04) 2552.39,2238 cw(c2552.39,2282.96) R9.2@2520.6,2251.17 ; C26.2@2522.16,1238.37 cw(c2568.41,1192.11) 2568.41,1257.53 ; C4.1@2524.31,1400.97 cw(c2551.68,1400.97) 2532.32,1420.32 ; 2592.1,2248.1 ccw(c2568.2,2272) v1@2602,2272 ; 2601.76,2257.76 cw(c2612,2247.51) v1@2612,2262 ; v1(2608,2548) 2608,2554 2619,2565 ; v1@2611,2267 2582,2238 R9.2@2513,2238 ; P4.2@2616,994.53 ccw(c2616,1007.87) 2625.44,998.44 ; v1@2616.95,2552.46 cw(c2626.69,2557.3) 2619,2565 ; P4.2@2617,982 2617,990 2677.92,1050.92 U12.2@2677.92,1167.96 ; P4.2@2620.53,970 cw(c2677.33,970) 2637.16,1010.16 ; P4.2@2630.53,970 cw(c2711.47,970) 2654.24,1027.23 ; P4.2@2640.53,970 cw(c2745.61,970) 2671.31,1044.31 ; U12.2@2678,1175 2678,1227 2647.47,1257.53 U12.13@2627.72,1257.53 2525.53,1257.53 C26.2@2513.56,1245.56 ; 2711,2565 cw(c2711,2458.37) R14.1@2786.4,2533.77 ; 2735.14,2565 cw(c2735.14,2482.51) R14.1@2793.47,2540.84 ; 2759.28,2565 cw(c2759.28,2506.66) R14.1@2800.54,2547.91 ; R14.1@2799.57,2543 2777.57,2565 2619,2565 ; 2022,1360 2012,1370 2012,1453 2026.42,1467.42 ; 2022,1360 2038,1376 ; 2023.02,1464.02 ccw(c2013.64,1473.39) 2026.9,1473.39 cw(c2013.64,1473.39) 2023.02,1464.02
  Bottom Layer w10: v1@1929.93,1438.07 ccw(c1879.06,1488.94) 1951,1488.94 ; v1@1944.07,1423.93 ccw(c1927.34,1440.66) 1951,1440.66 ; 1951,1464.8 cw(c1903.2,1464.8) v1(1937,1431) 1937,1433 1943,1439 1945,1439 1951,1445 v1@1951,1741 ; 1951,1690.39 cw(c2017.61,1690.39) v1@1970.51,1737.49 ; 1951,1714.53 cw(c1993.47,1714.53) v1(1963.44,1744.56) 1965.44,1754.44 2052,1841 v1(2060,1841) ; v1@1973.44,1744.56 cw(c2016.61,1744.56) 1986.08,1775.08 ; 2029.27,1818.27 cw(c2060,1787.54) v1@2060,1831 ; v1@2043,2086 2056,2099 ; v1@2050.33,2384.53 cw(c2036.64,2370.84) 2056,2370.84 ; v1@2054.51,2086.25 cw(c2063.32,2091.68) 2056,2099 ; 2056,2364.07 cw(c2084.93,2364.07) v1@2064.47,2384.53 ; v1(2057.4,2391.6) 2056,2390.2 2056,2099 ; U10.2@2109,1004 2112,1001 2155,1001 2160,1006 v1(2334,1006) ; U10.2@2109.21,1006.42 ccw(c2122.31,1019.52) 2122.31,1001 ; 2138.48,1001 ccw(c2138.48,1019.52) U10.1@2151.58,1006.42 ; U10.1@2158.42,999.58 cw(c2173.93,984.07) 2173.93,1006 ; 2230,1672.79 cw(c2271.21,1672.79) v1@2242.07,1701.93 ; v1@2230,1703 2230,1141 2256,1115 v1@2332,1115 ; 2302.62,1115 ccw(c2302.62,1149.38) v1@2326.93,1125.07 ; 2317.1,1115 cw(c2317.1,1101.1) v1@2326.93,1110.93 ; v1@2326.93,998.93 ccw(c2309.86,981.86) 2309.86,1006 ccw(c2309.86,1030.14) v1@2326.93,1013.07 ; v1@2600.93,2540.93 cw(c2557.3,2497.3) 2619,2497.3 ; v1@2604.93,2279.07 ccw(c2570.96,2313.04) 2619,2313.04 ; v1(2612,2272) ccw(c2595.1,2288.9) 2619,2288.9 ; v1@2619,2276 2619,2552.25 2612.62,2558.62 2608,2554 v1(2608,2548) cw(c2581.44,2521.44) 2619,2521.44
  other v1: 2235,1709 2046,2081
VCC3.3BT: C27.1 C28.1 U8.9 U9.5 | length 2536.1
  Top Layer w10: U8.9@1627.64,1622.33 cw(c1627.64,1554.65) 1675.49,1602.51 ; U8.9@1627.64,1632.33 cw(c1627.64,1588.8) 1658.42,1619.58 ; U8.9@1633,1645 1708,1570 2326,1570 ; U9.5@2271.21,2526.56 2323.44,2526.56 2400,2450 2469,2450 C27.1@2472,2447 ; U9.5@2283.9,2521.74 cw(c2295.53,2510.12) 2295.53,2526.56 cw(c2295.53,2543) U9.5@2283.9,2531.38 ; 2293.72,1570 cw(c2293.72,1511.72) v1@2334.93,1552.93 ; 2317.86,1570 cw(c2317.86,1535.86) v1(2342,1560) ; v1@2336.92,1568.61 cw(c2332.35,1576.35) 2326,1570 ; v1@2337,1559 2326,1570 ; 2446.6,2450 cw(c2446.6,2419.13) C27.1@2468.43,2440.96 ; 2453.57,2450 ccw(c2453.57,2471.02) C27.1@2468.43,2456.16 ; C27.1@2478,2448.56 C28.1@2553,2448.56 ; C27.1@2487.57,2440.96 cw(c2505.92,2422.61) 2505.92,2448.56 cw(c2505.92,2474.51) C27.1@2487.57,2456.16 ; C28.1@2543.43,2440.96 ccw(c2525.08,2422.61) 2525.08,2448.56 ccw(c2525.08,2474.51) C28.1@2543.43,2456.16 ; C28.1@2554.97,2437.81 cw(c2554.97,2416.61) 2569.96,2431.6 ; C28.1@2559,2447 2557.44,2448.56 C28.1@2553,2448.56 ; C28.1@2565.72,2448.56 ccw(c2596.42,2448.56) 2574.71,2426.85 ; v1@2577.93,2346.07 ccw(c2556.03,2367.97) 2587,2367.97 ; v1(2585,2339) 2587,2339 2587,2414.56 C28.1@2553,2448.56 ; 2587,2358.31 ccw(c2604.31,2358.31) v1@2592.07,2346.07
  Bottom Layer w10: v1@2334.93,1567.07 ccw(c2320.27,1581.73) 2341,1581.73 ; v1@2341,1559 2341,1611 2425,1695 2425,1998 2585,2158 v1(2585,2339) ; 2341,1586.56 ccw(c2368.56,1586.56) v1@2349.07,1567.07 ; v1@2577.93,2331.93 cw(c2560.86,2314.86) 2585,2314.86 cw(c2609.14,2314.86) v1@2592.07,2331.93
VCC3.7: C20.2 C21.2 L1.1 P3.1 P5.1 P6.1 P7.1 R15.2 S1.2 U4.4 U4.5 | length 10842.8
  Top Layer w10: C21.2@1154.96,2676.57 ccw(c1136.61,2694.92) 1162.56,2694.92 ccw(c1188.51,2694.92) C21.2@1170.16,2676.57 ; C20.2@1154.96,2769.43 cw(c1136.61,2751.08) 1162.56,2751.08 cw(c1188.51,2751.08) C20.2@1170.16,2769.43 ; C20.2@1154.96,2788.57 ccw(c1136.61,2806.92) 1162.56,2806.92 ccw(c1188.51,2806.92) C20.2@1170.16,2788.57 ; C21.2@1170.16,2659.4 cw(c1188.51,2641.05) 1188.51,2667 cw(c1188.51,2692.95) C21.2@1170.16,2674.6 ; 1196.4,2878.4 cw(c1281.66,2793.14) L1.1@1281.66,2913.72 ; 1213.47,2895.47 cw(c1281.66,2827.28) L1.1@1281.66,2923.72 ; 1230.54,2912.54 cw(c1281.66,2861.42) L1.1@1281.66,2933.72 ; v1@1236.93,2659.93 ccw(c1219.86,2642.86) 1219.86,2667 ccw(c1219.86,2691.14) v1@1236.93,2674.07 ; v1(1244,2667) C21.2@1162.56,2667 C20.2@1162.56,2779 1162.56,2844.56 1257.23,2939.23 L1.1@1263,2945 ; 1247.61,2929.61 cw(c1281.66,2895.56) L1.1@1281.66,2943.72 ; v1@1352.93,2633.93 cw(c1335.86,2616.86) 1360,2616.86 cw(c1384.14,2616.86) v1@1367.07,2633.93 ; U4.4@1356.18,2497.41 ccw(c1344.56,2509.04) 1361,2509.04 ccw(c1377.44,2509.04) U4.4@1365.82,2497.41 ; U4.5@1356.18,2562.59 cw(c1344.56,2550.96) 1361,2550.96 cw(c1377.44,2550.96) U4.5@1365.82,2562.59 ; U4.5@1356.18,2572.22 ccw(c1346.97,2581.43) 1360,2581.43 ; U4.5@1358,2570 1360,2572 v1(1360,2641) ; 1360,2586.26 ccw(c1379.86,2586.26) U4.5@1365.82,2572.22 ; U4.4@1361,2498 U4.5@1361,2567.4 ; R15.2@2492.88,1613.8 ccw(c2487.63,1625) 2500,1625 ; R15.2@2499.53,1596.36 cw(c2527.26,1609.1) 2505.68,1630.68 ; R15.2@2500,1607 2500,1625 ; 2506.22,1624.18 cw(c2538.12,1605.76) v1@2528.59,1641.34 ; R15.2@2507.36,1614.36 cw(c2511.37,1625) 2500,1625 ; R15.2@2508.61,1600.54 cw(c2541.18,1615.5) v1@2515.84,1640.84 ; 2515.2,1639.73 ccw(c2505.29,1645.45) v1@2516.34,1648.41 ; v1@2516,1651 cw(c2491.86,1651) 2508.93,1633.93 cw(c2526,1616.86) v1@2526,1641 ; v1@2516.62,1647.53 cw(c2500.02,1641.4) 2515.35,1632.55 cw(c2530.67,1623.7) v1@2527.69,1641.14 ; R15.2@2517.7,1604.71 cw(c2555.1,1621.89) v1(2526,1651) 2500,1625
  Top Layer w30: P3.1@746,3206 912,3206 1178.77,2939.23 1257.23,2939.23 L1.1@1323,2939.23 ; L1.1@1270.69,2928.26 ccw(c1244.21,2901.78) 1244.21,2939.23 ccw(c1244.21,2976.68) L1.1@1270.69,2950.2 ; L1.1@1357,2938 1394,2938 1445,2887 2681,2887 v2(2731,2937) ; L1.1@1364.34,2923.72 cw(c1364.34,2817.62) 1439.36,2892.64 ; v2(1871,1015) 1967,1015 2193,1241 v2(2373,1241)
  Bottom Layer w10: v1(1244,2667) 1334,2667 v1(1360,2641) ; v1@1251.07,2659.93 cw(c1268.14,2642.86) 1268.14,2667 cw(c1268.14,2691.14) v1@1251.07,2674.07 ; v1@1350,2641 ccw(c1325.86,2641) 1342.93,2658.07 ccw(c1360,2675.14) v1@1360,2651 ; v1@2523,1650 2627,1650 S1.2@2800,1823 ; v1@2533.07,1643.93 cw(c2547.73,1629.27) 2547.73,1650 ; v1@2533.07,1658.07 ccw(c2552.56,1677.56) 2552.56,1650 ; S1.2@2775.47,1823 cw(c2716.26,1823) 2758.13,1781.13 cw(c2800,1739.26) S1.2@2800,1798.47 ; S1.2@2785.47,1823 cw(c2750.4,1823) 2775.2,1798.2 cw(c2800,1773.4) S1.2@2800,1808.47
  Bottom Layer w30: P5.1@717,672 854,672 ; P5.1@718.31,681.31 ccw(c740.8,703.8) 740.8,672 ; 855,672 854,672 ; v2(1871,1015) 1711,1015 1666,970 1231,970 990.09,729.09 911.09,729.09 854,672 ; v2(2373,1241) 2800,1668 S1.2@2800,1823 ; v2@2723.93,2929.93 cw(c2694.79,2900.79) 2736,2900.79 ; v2@2731,2947 ccw(c2731,2995.28) 2765.14,2961.14 ; S1.2@2789.73,1812.73 cw(c2764.93,1787.93) 2800,1787.93 cw(c2835.07,1787.93) S1.2@2810.27,1812.73 ; S1.2@2800,1808.47 cw(c2800,1773.4) 2824.8,1798.2 cw(c2849.6,1823) 2814.53,1823 cw(c2849.6,1823) 2824.8,1847.8 cw(c2800,1872.6) S1.2@2800,1837.53 ; P6.1@3225,635 3053,635 2889,799 2889,1734 S1.2@2800,1823 ; P7.1@3261.69,3205.31 ccw(c3217.48,3249.52) 3280,3249.52 ; P7.1@3280,3207 3280,3273 3240,3313 3151,3313 3014.99,3176.99 2980.99,3176.99 2742,2938 2736,2938 2736,2871 2880.53,2726.47 2880.53,1903.53 S1.2@2800,1823
VCC5: C8.1 C22.1 C23.1 D1.2 D3.2 R4.1 U3.1 U3.3 U9.1 | length 2670.7
  Top Layer w10: R4.1@996,2565.43 1078.57,2565.43 ; R4.1@1013.11,2552.27 cw(c1044.89,2520.48) 1044.89,2565.43 cw(c1044.89,2610.39) R4.1@1013.11,2578.6 ; C8.1@1092.07,2551.93 ccw(c1103.91,2563.77) C8.1@1106.9,2547.3 ; C8.1@1105,2550 1094,2550 1078.57,2565.43 ; C8.1@1105.11,2557.14 cw(c1099.76,2586.63) 1078.57,2565.43 ; C8.1@1109,2546.56 v1@1157,2546.56 ; C8.1@1118.57,2538.96 cw(c1136.92,2520.61) 1136.92,2546.56 cw(c1136.92,2572.51) C8.1@1118.57,2554.16 ; 1127.26,2546.56 cw(c1127.26,2510.26) v1@1152.93,2535.93 ; 1144.45,2546.56 ccw(c1144.45,2558.55) v1@1152.93,2550.07 ; D1.2@1433.92,2702.35 cw(c1395.1,2663.53) 1450,2663.53 ; D1.2@1440.99,2709.42 cw(c1419.24,2687.67) 1450,2687.67 ; v1@1442.93,2650.07 ccw(c1425.86,2667.14) 1450,2667.14 ccw(c1474.14,2667.14) v1@1457.07,2650.07 ; D1.2@1446,2714.43 ccw(c1480.12,2748.56) 1480.12,2700.3 ; D1.2@1446.63,2719 1448,2710 1450,2708 v1(1450,2643) ; D1.2@1447,2716 1462.7,2700.3 C22.1@1680,2700.3 1830.3,2550 U3.3@1976,2550 ; 1450,2660.79 cw(c1508.77,2660.79) D1.2@1467.21,2702.35 ; 1450,2684.93 cw(c1484.63,2684.93) D1.2@1460.14,2709.42 ; D1.2@1453.07,2721.51 ccw(c1504.27,2772.7) 1504.27,2700.3 ; D1.2@1460.14,2728.58 ccw(c1528.41,2796.84) 1528.41,2700.3 ; D1.2@1467.21,2735.65 ccw(c1552.55,2820.98) 1552.55,2700.3 ; C23.1@1589.43,2692.7 ccw(c1571.08,2674.35) 1571.08,2700.3 ccw(c1571.08,2726.25) C23.1@1589.43,2707.9 ; C23.1@1608.57,2692.7 cw(c1626.92,2674.35) 1626.92,2700.3 cw(c1626.92,2726.25) C23.1@1608.57,2707.9 ; C22.1@1670.43,2692.7 ccw(c1652.08,2674.35) 1652.08,2700.3 ccw(c1652.08,2726.25) C22.1@1670.43,2707.9 ; C22.1@1681.97,2689.55 cw(c1681.97,2668.36) 1696.96,2683.34 ; C22.1@1692.72,2700.3 ccw(c1723.42,2700.3) 1701.71,2678.59 ; 1961.84,2550 cw(c1961.84,2527.45) U3.3@1977.78,2543.4 ; 1970.47,2550 ccw(c1970.47,2560.34) U3.3@1977.78,2553.03 ; U3.3@1981,2550 U3.3@1976,2550 ; U3.3@1989.41,2556.09 cw(c2023.99,2556.09) 1999.54,2580.54 ; 2039.05,2583.95 cw(c2011.18,2556.09) U3.1@2050.59,2556.09 ; U3.1@2055,2546 2074.44,2526.56 ; U3.1@2057.4,2548.21 2057.4,2565.6 2032,2591 2010,2591 1976,2557 U3.3@1976,2550 ; U3.1@2057.45,2533.53 cw(c2057.62,2509.74) 2074.44,2526.56 ; U9.1@2160.1,2521.74 ccw(c2148.47,2510.12) 2148.47,2526.56 ccw(c2148.47,2543) U9.1@2160.1,2531.38 ; D3.2@2165.4,2615.89 cw(c2133.61,2584.1) 2178.57,2584.1 cw(c2223.52,2584.1) D3.2@2191.73,2615.89 ; U9.1@2172.79,2526.56 2074.44,2526.56 ; U9.1@2178.57,2532.57 D3.2@2178.57,2633 ; 2178.57,2548.06 ccw(c2202.17,2548.06) U9.1@2185.48,2531.38
  Bottom Layer w10: v1(1160,2543) 1163.56,2546.56 1429.56,2546.56 1450,2567 v1(1450,2643) ; v1@1167.07,2535.93 cw(c1192.74,2510.26) 1192.74,2546.56 ; v1@1167.07,2550.07 ccw(c1175.55,2558.55) 1175.55,2546.56 ; v1@1442.93,2635.93 cw(c1425.86,2618.86) 1450,2618.86 cw(c1474.14,2618.86) v1@1457.07,2635.93
pads on no net: S1.1 S1.3 S1.5 U2.2 U2.4 U2.5 U2.14 U2.16 U2.19 U2.21 U2.22 U3.4 U7.1 U7.2 U7.9 U7.10 U7.11 U7.12 U7.13 U7.14 U7.15 U7.16 U7.17 U7.18 U7.19 U7.20 U7.21 U7.22 U7.23 U7.27 U8.1 U8.3 U8.5 U8.6 U8.7 U8.8 U8.10 U8.11 U8.13 U8.14 U8.16 U9.4 U10.6 U11.2 U12.3 U12.4 U12.5 U12.6 U12.7 U12.14 USB. USB.4
copper on no net: | length 88.8
  Top Layer w10: 234,-1262 279,-1262 310,-1231
  other v3: 3687,198 212,214 230,3668 3692,3670
  other v4: 3377,503 525,520 543,3363 3385,3363

## Polygon pours and split planes (outlines as drawn)
GND on Bottom Layer "PourTop" (hatched 90Degree grid 20 track 8, remove dead copper, pour order 4): -80,4060 -70,4070 4140,4070 4140,10 4010,-120 3910,-20 -450,-20 -450,3570 70,4090
GND on Top Layer "PourTop" (hatched 90Degree grid 20 track 8, remove dead copper, pour order 6): -100,4060 -40,4000 4110,4000 4110,0 3970,-140 3900,-70 -140,-70 -140,3990 -90,4040 -40,3990 280,3990

## Keep-outs
Keep-Out Layer:
  the board outline again, w10

## Silkscreen, mask and mechanical layers (free items; w line width, h text height)
Top Overlay:
  drawing of 1681 lines, arcs and shapes, not listed
  text "M4" at 3442,3484 h60 r315
  text "M1" at 418,3431 h60 r43.13
  text "L" at 2926,2669 h30 r180
  text "L" at 2306,2650 h30 r180
  text "_" at 2925,2634 h30 r180
  text "_" at 2305,2615 h30 r180
  text "ON" at 2718,1710 h40
  text "_" at 1307,916 h30 r90
  text "L" at 1342,915 h30 r90
  text "M3" at 3512,444 h60 r222.56
  text "M2" at 465,398 h60 r141.55
Bottom Overlay:
  lines w10: 762.93,3051.21 741.72,3030 770,3001.72 791.21,3022.93 ; 848.79,752.93 870,731.72 898.28,760 877.07,781.21 ; 2890,2200 2920,2200 2920,2240 2890,2240 ; 3062.93,3148.79 3041.72,3170 3070,3198.28 3091.21,3177.07 ; 3178.79,817.07 3200,838.28 3228.28,810 3207.07,788.79

## Text inside footprints (layer, text, board x,y; h text height)
S1: Bottom Overlay "6" at 2780,2083 h50 r270; Bottom Overlay "5" at 2680,2083 h50 r270; Bottom Overlay "2" at 2780,1723 h50 r270; Bottom Overlay "1" at 2680,1743 h50 r270